# EAGLE board v5-CPU-Section (EAGLE 7.5.0)
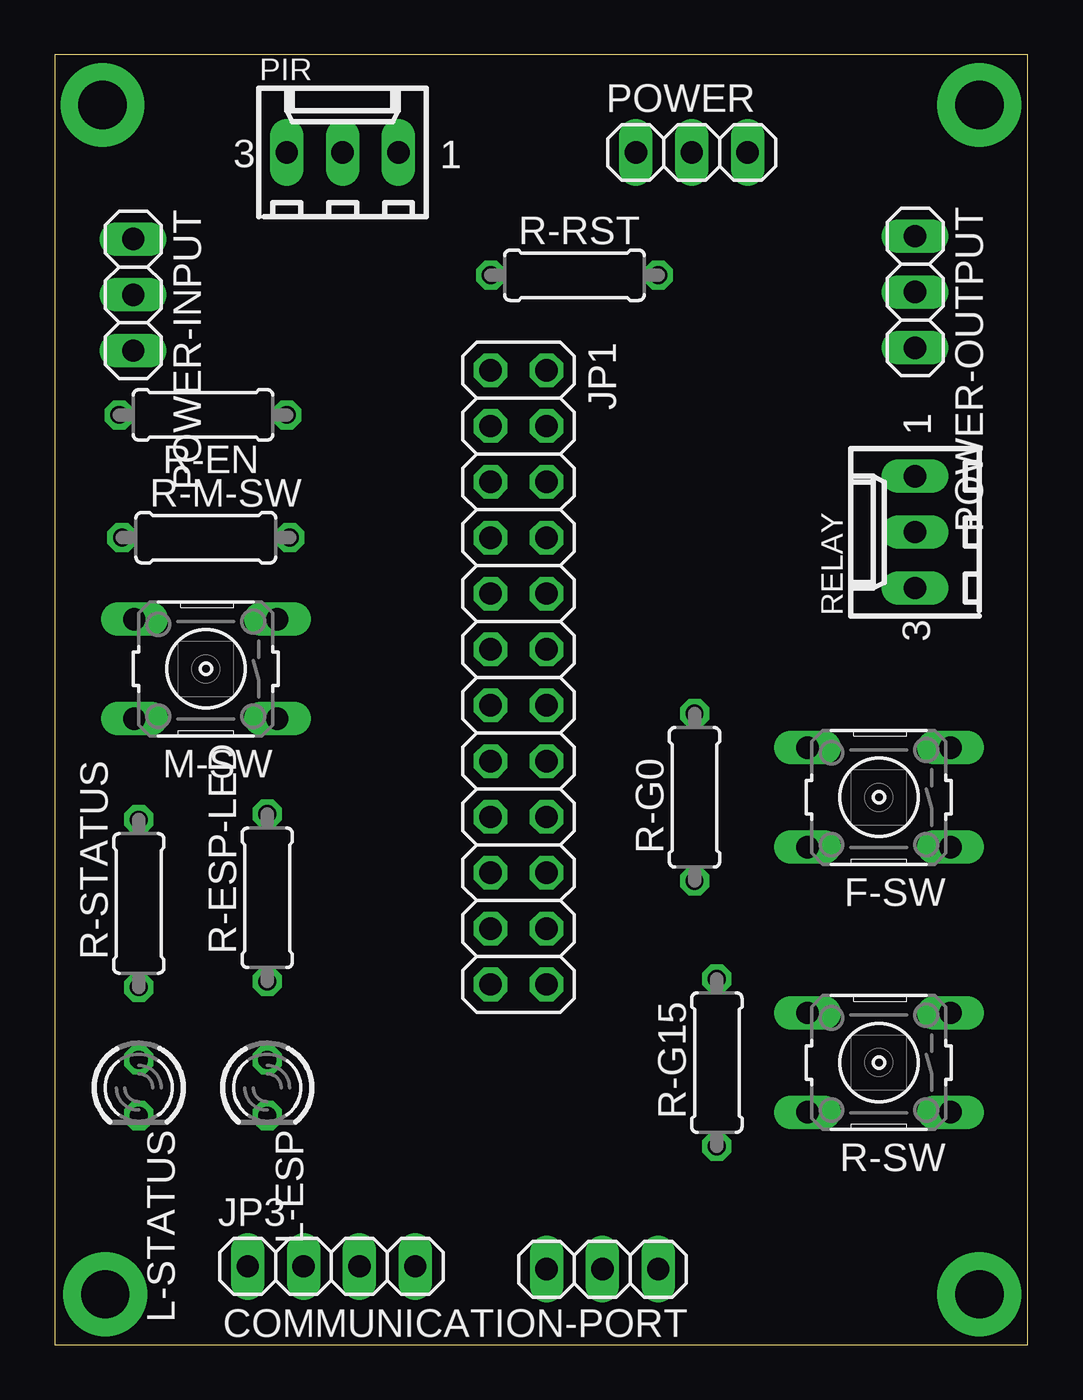
[diagram p0: board, top side]
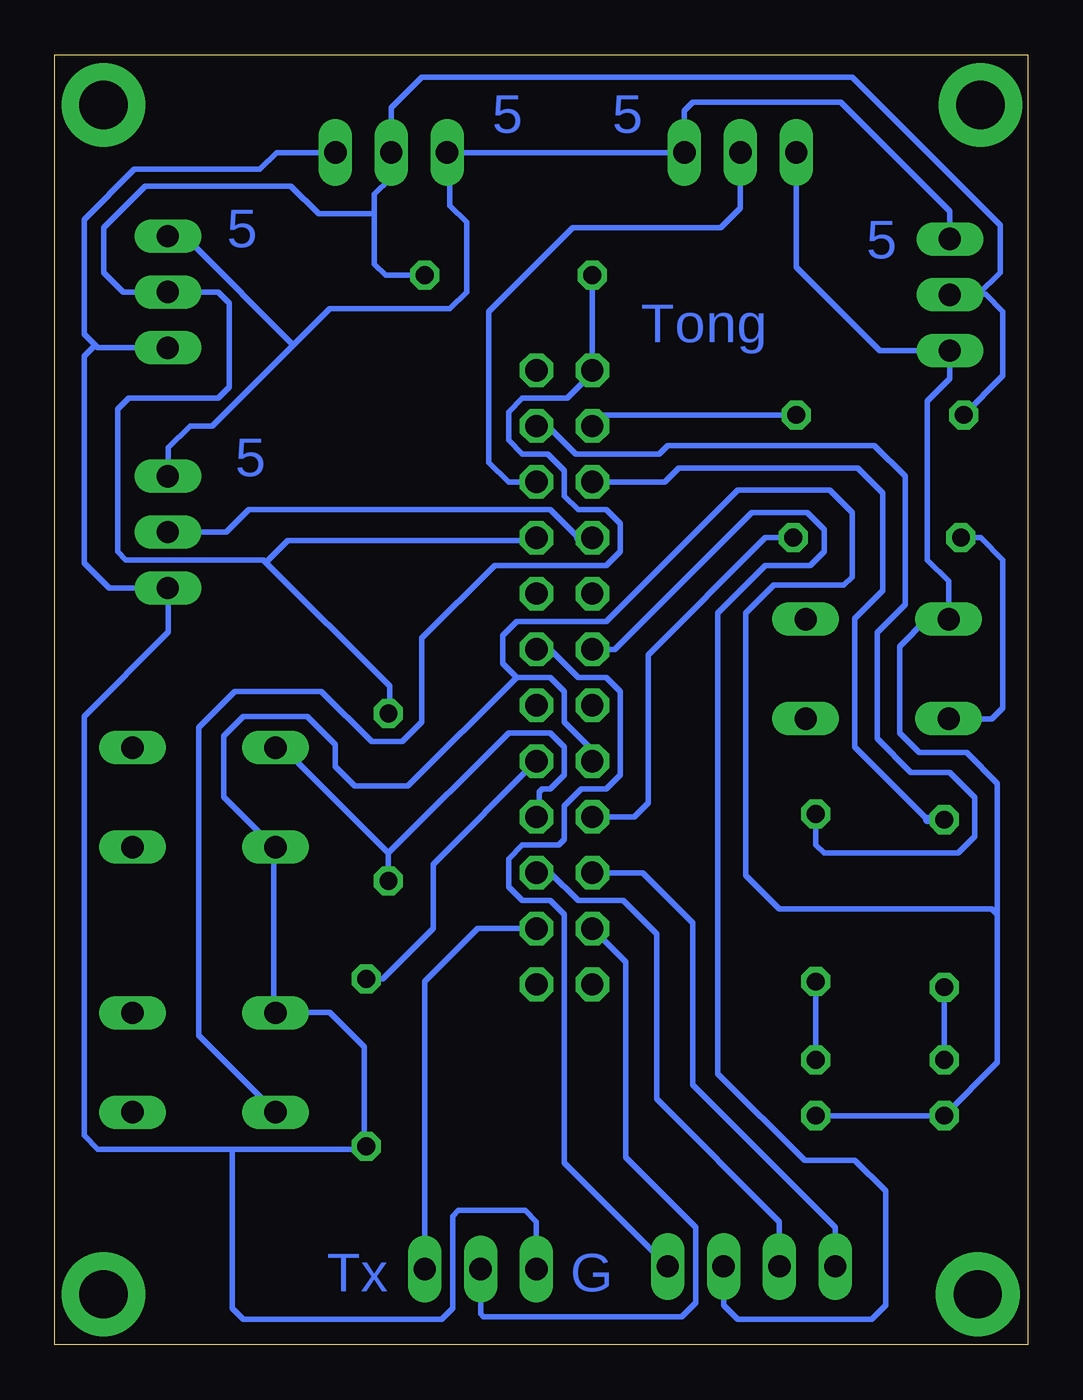
[diagram p1: board, bottom side, seen from below]

Size 44.25 x 58.66 mm. Coordinates in mm from the lower left corner, seen from the top.
Outline: 0,0 44.25,0 44.25,58.66 0,58.66 0,0
Copper layers (1*16): Top 0.035mm / dielectric 1.5mm / Bottom 0.035mm
Design rules "default": minimum track width 10mil, minimum drill 24mil, track to track 8mil, track to pad 8mil, pad to pad 8mil, via to via 8mil, smd to smd 8mil, copper to edge 40mil, drill to drill 8mil, minimum pad ring 10mil, minimum via ring 8mil, stop-mask expansion 4mil, vias tented up to drill 0mil, thermal gap 10mil

## Footprints (pad centres in the part's own frame; a part is rotated, then mirrored left to right if it is on the bottom)
1X03 = drill 1.016 long: 1 -2.54,0; 2 0,0; 3 2.54,0
B3F-10XX = drill 1.016 long: 1 -3.251,2.261; 2 3.251,2.261; 3 -3.251,-2.261; 4 3.251,-2.261
2X12 = drill 1.016 octagon: 1 -13.97,-1.27; 2 -13.97,1.27; 3 -11.43,-1.27; 4 -11.43,1.27; 5 -8.89,-1.27; 6 -8.89,1.27; 7 -6.35,-1.27; 8 -6.35,1.27; 9 -3.81,-1.27; 10 -3.81,1.27; 11 -1.27,-1.27; 12 -1.27,1.27; 13 1.27,-1.27; 14 1.27,1.27; 15 3.81,-1.27; 16 3.81,1.27; 17 6.35,-1.27; 18 6.35,1.27; 19 8.89,-1.27; 20 8.89,1.27; 21 11.43,-1.27; 22 11.43,1.27; 23 13.97,-1.27; 24 13.97,1.27
1X04 = drill 1.016 long: 1 -3.81,0; 2 -1.27,0; 3 1.27,0; 4 3.81,0
LED3MM = drill 0.813 octagon: A -1.27,0; K 1.27,0
6410-03 = drill 1.016 long: 1 2.54,0; 2 0,0; 3 -2.54,0
0207/7 = drill 0.813 octagon: 1 -3.81,0; 2 3.81,0

## Placement (x,y rotation side)
COMMUNICATION-PORT  [1X03]  24.89,3.43 180 top
F-SW  [B3F-10XX]  37.47,24.89 180 top
JP1  [2X12]  21.08,30.35 270 top
JP3  [1X04]  12.57,3.56 0 top
L-ESP  [LED3MM]  9.65,11.68 270 top
L-STATUS  [LED3MM]  3.81,11.68 270 top
M-SW  [B3F-10XX]  6.86,30.73 180 top
PIR  22-27-2031-03  [6410-03]  13.08,54.23 0 top
POWER  [1X03]  28.96,54.23 0 top
POWER-INPUT  [1X03]  3.56,47.75 270 top
POWER-OUTPUT  [1X03]  39.12,47.88 270 top
R-EN  10k  [0207/7]  6.73,42.29 180 top
R-ESP-LED  470  [0207/7]  9.65,20.32 90 top
R-G0  10k  [0207/7]  29.08,24.89 90 top
R-G15  1k  [0207/7]  30.1,12.83 90 top
R-M-SW  470  [0207/7]  6.86,36.7 0 top
R-RST  10k  [0207/7]  23.62,48.64 0 top
R-STATUS  470  [0207/7]  3.81,20.07 90 top
R-SW  [B3F-10XX]  37.47,12.83 180 top
RELAY  22-27-2031-03  [6410-03]  39.12,36.96 90 top

## Library data of the parts
COMMUNICATION-PORT JP1 JP3 POWER POWER-INPUT POWER-OUTPUT = pinhead
F-SW M-SW R-SW = switch-omron; MPN: B3F-1000; OC_FARNELL: 176432; OC_NEWARK: 36M3542
L-ESP L-STATUS = led
PIR RELAY = con-molex; OC_FARNELL: unknown; OC_NEWARK: unknown
R-EN R-ESP-LED R-G0 R-G15 R-M-SW R-RST R-STATUS = rcl

## Nets
3V3: JP1.8 POWER-INPUT.2 POWER-OUTPUT.2 POWER.2 R-EN.2 R-G0.2 R-RST.2
+5V: PIR.1 POWER-INPUT.1 POWER-OUTPUT.1 POWER.1 RELAY.1
ADC: JP1.2
CS0: JP1.9
EN: JP1.3 R-EN.1
G-00: F-SW.4 JP1.18 R-G0.1
G-02: JP1.17 R-M-SW.2
G-04: JP1.19 JP3.1
G-05: JP1.20 JP3.2
G-09: JP1.11 JP3.3
G-10: JP1.12 JP3.4
G-12: JP1.6 PIR.2
G-13: JP1.7 RELAY.2
G-14: JP1.5 R-STATUS.2
G-15: JP1.16 R-G15.2
G-16: JP1.4 R-ESP-LED.2
GND: COMMUNICATION-PORT.3 F-SW.2 JP1.15 L-ESP.K L-STATUS.K M-SW.4 PIR.3 POWER-INPUT.3 POWER-OUTPUT.3 POWER.3 R-G15.1 R-SW.4 RELAY.3
MISO: JP1.10
MOSI: JP1.13
N$1: L-STATUS.A R-STATUS.1
N$2: L-ESP.A R-ESP-LED.1
N$11: M-SW.2 R-M-SW.1
RST: JP1.1 R-RST.1 R-SW.2
RX: COMMUNICATION-PORT.2 JP1.21
SCLK: JP1.14
TX: COMMUNICATION-PORT.1 JP1.22

## Tracks (layer width: path | path; a pad name or v marks a point on that pad's centre or on a via)
3V3
  Bottom 0.254: R-G0.2 29.03,28.8 29.03,29.95 34.66,35.57 | JP1.8 22.4,36.58 33.66,36.58 34.66,35.57 | POWER.2 29.03,54.18 29.03,53.01 29.72,52.32 29.72,51.44 | POWER-INPUT.2 3.43,47.78 2.26,47.78 | 28.8,54.41 POWER.2 | 2.26,47.78 1.27,48.77 1.27,50.93 8,57.66 27.56,57.66 28.96,56.26 POWER.2 | 2.26,47.78 1.93,47.78 1.14,46.99 1.14,44.07 R-EN.2 | R-RST.2 29.21,48.64 29.72,49.15 29.72,51.44 | 34.66,35.57 34.77,35.69 41.02,35.69 41.4,36.07 41.4,42.55 40.89,43.05 36.83,43.05 36.32,43.56 36.32,47.37 36.83,47.88 POWER-OUTPUT.2 41.15,47.88 42.04,48.77 42.04,50.8 40.13,52.7 33.53,52.7 32.26,51.44 29.72,51.44
+5V
  Bottom 0.254: 39.09,50.29 POWER-OUTPUT.1 38.1,50.42 38.1,50.16 33.4,45.47 | 15.77,54.18 PIR.1 15.62,56.13 15.24,56.52 8.51,56.52 3.56,51.56 POWER-INPUT.1 | 15.82,54.23 POWER.1 26.29,54.18 26.29,51.82 25.53,51.05 25.53,47.88 26.29,47.12 31.75,47.12 33.4,45.47 | RELAY.1 39.09,39.55 39.09,40.79 38.1,41.78 37.08,41.78 33.4,45.47
  Bottom 0.406: 15.77,54.18 15.82,54.23
EN
  Bottom 0.254: R-EN.1 19.3,42.29 JP1.3
G-00
  Bottom 0.254: 29.08,22.35 23.62,27.81 21.72,27.81 21.08,27.18 21.08,25.91 21.72,25.27 22.1,25.27 22.23,25.15 22.23,24.13 | 29.08,22.35 R-G0.1 | 29.08,22.35 33.88,27.15 F-SW.4
  Bottom 0.406: 22.23,24.13 JP1.18
G-02
  Bottom 0.254: R-M-SW.2 11.94,36.7 17.27,31.37 17.27,24.64 17.91,24 JP1.17
G-04
  Bottom 0.254: JP3.1 8.76,5.33 15.24,11.81 15.24,19.18 17.53,21.46 JP1.19
G-05
  Bottom 0.254: JP3.2 11.3,5.59 16.89,11.18 16.89,18.67 18.41,20.19 20.45,20.19 21.72,21.46 JP1.20
G-09
  Bottom 0.254: JP1.11 18.8,31.62 12.57,37.85 10.03,37.85 9.27,37.08 9.27,36.07 9.91,35.43 11.94,35.43 14.1,33.27 14.1,12.32 10.16,8.38 7.87,8.38 6.48,6.99 6.48,1.78 7.11,1.14 13.21,1.14 13.84,1.78 JP3.3
G-10
  Bottom 0.254: JP1.12 21.72,31.62 20.45,30.35 19.18,30.35 18.54,29.72 18.54,25.91 19.18,25.27 20.32,25.27 21.08,24.51 21.08,22.99 21.34,22.73 22.99,22.73 23.62,22.1 23.62,20.83 22.99,20.19 21.72,20.19 21.08,19.56 21.08,8.26 JP3.4
G-12
  Bottom 0.254: 22.4,39.32 JP1.6 | 22.48,39.24 23.62,39.24 24.51,40.13 24.51,46.99 20.7,50.8 13.97,50.8 13.08,51.69 PIR.2
  Bottom 0.406: 22.4,39.32 22.48,39.24
G-13
  Bottom 0.254: 20.45,36.7 21.72,37.97 35.43,37.97 36.45,36.96 RELAY.2
  Bottom 0.406: JP1.7 20.45,36.7
G-14
  Bottom 0.254: 4.57,23.88 7.87,27.18 7.87,33.02 6.6,34.29 6.6,38.73 7.75,39.88 15.88,39.88 16.51,39.24 JP1.5
  Bottom 0.406: R-STATUS.2 4.57,23.88
G-15
  Bottom 0.254: JP1.16 27.05,21.84 27.05,18.92 29.34,16.64 R-G15.2
G-16
  Bottom 0.254: JP1.4 21.84,41.78 20.57,40.51 16.76,40.51 16.38,40.89 6.99,40.89 5.59,39.5 5.59,33.66 6.86,32.38 6.86,27.56 5.33,26.04 3.56,26.04 2.41,24.89 2.41,23.11 3.17,22.35 9.27,22.35 9.65,22.73 R-ESP-LED.2
GND
  Bottom 0.254: 3.66,45.03 POWER-INPUT.3 | 30.18,9.14 R-G15.1 30.18,9.37 30.18,13.54 31.75,15.11 34.19,15.11 R-SW.4 | 34.06,15.09 R-SW.4 | R-SW.4 34.29,15.09 34.29,22.55 | POWER-INPUT.3 6.73,45.21 10.54,49.02 PIR.3 | POWER-INPUT.3 3.56,43.94 4.57,42.93 4.57,35.69 3.61,34.72 M-SW.4 4.6,32.99 5.84,31.75 5.84,27.81 4.95,26.92 2.79,26.92 1.4,25.53 1.4,19.56 | 1.4,19.56 1.4,12.83 L-STATUS.K L-ESP.K | 42.42,45.47 42.93,45.97 42.93,51.18 40.64,53.47 34.92,53.47 34.16,54.23 POWER.3 | 42.42,45.47 42.29,45.34 POWER-OUTPUT.3 | 42.42,45.47 42.93,44.96 42.93,35.56 41.78,34.42 RELAY.3 39.09,34.29 39.09,32.41 42.93,28.57 42.93,9.53 42.29,8.89 36.2,8.89 | COMMUNICATION-PORT.3 22.35,5.59 22.86,6.1 25.91,6.1 26.16,5.84 26.16,1.65 26.67,1.14 35.69,1.14 36.2,1.65 36.2,8.89 | 36.2,8.89 30.23,8.89 | 23.24,30.35 28.19,25.4 30.61,25.4 31.5,26.29 31.5,27.3 32.77,28.57 35.69,28.57 36.58,27.69 36.58,24.92 34.29,22.63 F-SW.2 | 23.24,30.35 21.72,30.35 21.08,29.72 21.08,28.32 19.81,27.05 JP1.15 | 23.24,30.35 23.88,30.99 23.88,32.26 23.24,32.89 19.18,32.89 13.21,38.86 9.02,38.86 8,37.85 8,34.92 8.38,34.54 11.56,34.54 12.83,33.27 12.83,21.34 11.3,19.81 1.65,19.81 1.4,19.56
  Bottom 0.406: 34.29,22.55 F-SW.2 | 30.23,8.89 R-G15.1
N$1
  Bottom 0.254: R-STATUS.1 L-STATUS.A
N$2
  Bottom 0.254: R-ESP-LED.1 L-ESP.A
N$3  (via drill 2.2 pad 3.81)
  other vias: 2.16,56.39
N$4  (via drill 2.2 pad 3.81)
  other vias: 42.04,56.39
N$5  (via drill 2.2 pad 3.81)
  other vias: 42.04,2.29
N$6  (via drill 2.2 pad 3.81)
  other vias: 2.29,2.29
N$11
  Bottom 0.254: R-M-SW.1 2.16,36.7 1.14,35.69 1.14,28.96 1.65,28.45 3.58,28.45
  Bottom 0.406: 3.58,28.45 M-SW.2
RST
  Bottom 0.254: R-RST.1 JP1.1 19.89,44.12 20.95,43.05 22.99,43.05 23.62,42.42 23.62,41.15 22.99,40.51 21.84,40.51 21.08,39.75 21.08,38.61 20.45,37.97 19.18,37.97 18.54,37.34 18.54,36.07 19.18,35.43 24.26,35.43 27.56,32.13 27.56,28.32 28.45,27.43 29.84,27.43 32.13,29.72 36.07,29.72 37.72,28.07 37.72,14.07 R-SW.2
RX
  Bottom 0.254: JP1.21 18.29,17.4 18.29,8.51 15.11,5.33 15.11,1.91 15.75,1.27 24.77,1.27 24.89,1.4 COMMUNICATION-PORT.2
TX
  Bottom 0.254: JP1.22 25.02,18.92 27.43,16.51 COMMUNICATION-PORT.1

## Text on the board
Bottom: 5 | 5 | 5 | 5 | Tong | 5 | G | Tx